# EAGLE board PCB_4 (EAGLE 6.5.0)
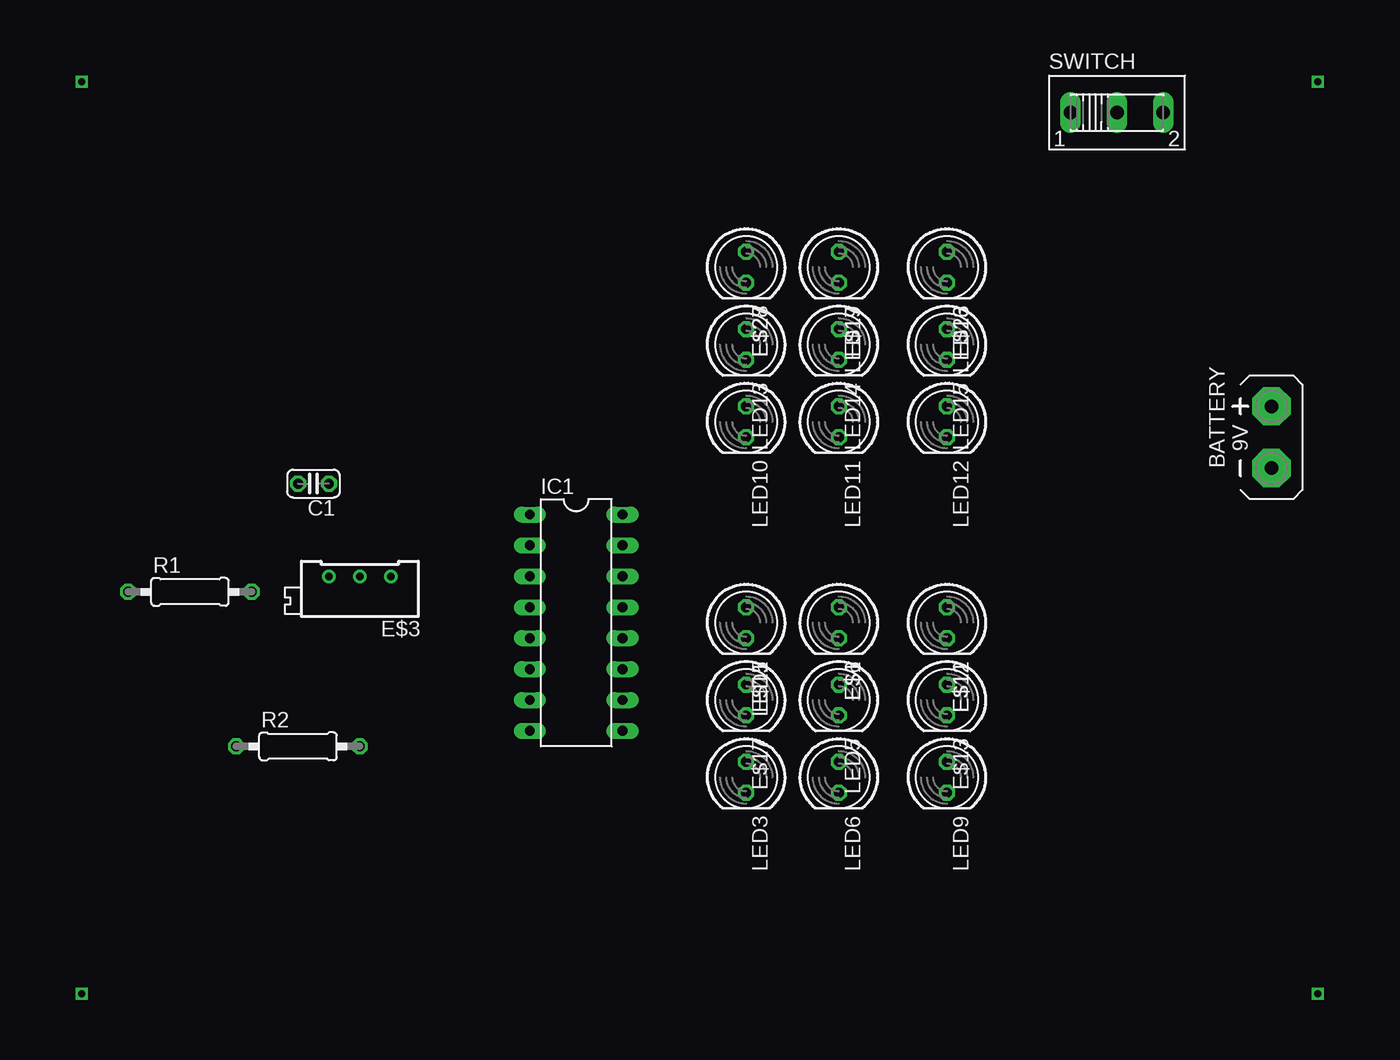
[diagram p0: board, top side]
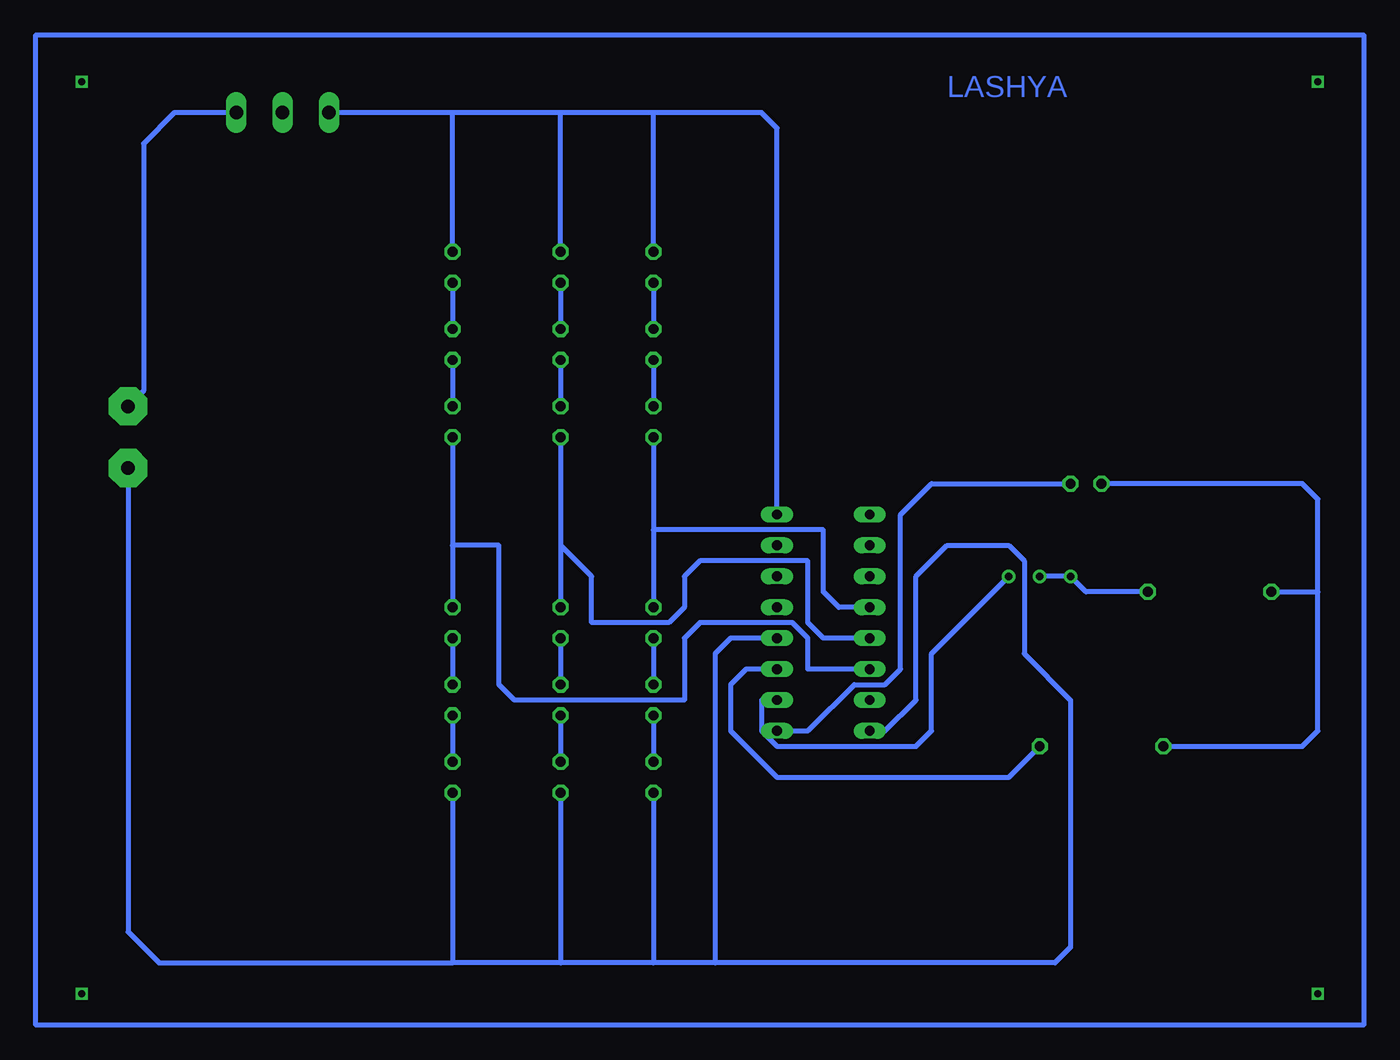
[diagram p1: board, bottom side, seen from below]

No outline drawn. Coordinates in mm, seen from the top.
Copper layers (1*16): Top 0.035mm / dielectric 1.5mm / Bottom 0.035mm
Design rules "default": minimum track width 10mil, minimum drill 24mil, track to track 8mil, track to pad 8mil, pad to pad 8mil, via to via 8mil, smd to smd 8mil, copper to edge 40mil, drill to drill 8mil, minimum pad ring 10mil, minimum via ring 8mil, stop-mask expansion 4mil, vias tented up to drill 0mil, thermal gap 10mil

## Footprints (pad centres in the part's own frame; a part is rotated, then mirrored left to right if it is on the bottom)
AB9V = drill 1.118 pad 3.15 octagon: + 0,2.54; - 0,-2.54
C025-024X044 = drill 0.813 octagon: 1 -1.27,0; 2 1.27,0
LED5MM = drill 0.813 octagon: A -1.27,0; K 1.27,0
RTRIM64X = drill 0.61: 1 1.27,-2.54; 2 1.27,0; 3 1.27,2.54
DIL16 = drill 0.813 long: 1 -8.89,-3.81; 2 -6.35,-3.81; 3 -3.81,-3.81; 4 -1.27,-3.81; 5 1.27,-3.81; 6 3.81,-3.81; 7 6.35,-3.81; 8 8.89,-3.81; 9 8.89,3.81; 10 6.35,3.81; 11 3.81,3.81; 12 1.27,3.81; 13 -1.27,3.81; 14 -3.81,3.81; 15 -6.35,3.81; 16 -8.89,3.81
0207/10 = drill 0.813 octagon: 1 -5.08,0; 2 5.08,0
255SB = drill 1.118 long: 1 -3.81,0; 2 0,0; 3 3.81,0

## Placement (x,y rotation side)
BATTERY  [AB9V]  100.33,49.53 0 top
C1  [C025-024X044]  21.59,45.72 180 top
E$1  [LED5MM]  64.77,34.29 270 top
E$3  47K  [RTRIM64X]  25.4,36.83 90 top
E$6  [LED5MM]  64.77,34.29 270 top
E$11  [LED5MM]  73.66,34.29 270 top
E$12  [LED5MM]  73.66,34.29 270 top
E$13  [LED5MM]  73.66,27.94 270 top
E$15  [LED5MM]  57.15,34.29 270 top
E$17  [LED5MM]  57.15,27.94 270 top
E$19  [LED5MM]  64.77,63.5 270 top
E$23  [LED5MM]  73.66,63.5 270 top
E$27  [LED5MM]  57.15,63.5 270 top
E$28  [LED5MM]  57.15,63.5 270 top
IC1  [DIL16]  43.18,34.29 270 top
LED1  [LED5MM]  57.15,34.29 270 top
LED3  [LED5MM]  57.15,21.59 270 top
LED5  [LED5MM]  64.77,27.94 270 top
LED6  [LED5MM]  64.77,21.59 270 top
LED9  [LED5MM]  73.66,21.59 270 top
LED10  [LED5MM]  57.15,50.8 270 top
LED11  [LED5MM]  64.77,50.8 270 top
LED12  [LED5MM]  73.66,50.8 270 top
LED13  [LED5MM]  57.15,57.15 270 top
LED14  [LED5MM]  64.77,57.15 270 top
LED15  [LED5MM]  73.66,57.15 270 top
LED16  [LED5MM]  73.66,63.5 270 top
LED17  [LED5MM]  64.77,63.5 270 top
R1  10K  [0207/10]  11.43,36.83 0 top
R2  470K  [0207/10]  20.32,24.13 0 top
SWITCH  [255SB]  87.63,76.2 0 top

## Library data of the parts
BATTERY = battery
C1 E$3 R1 R2 = resistor
E$1 E$6 E$11-E$13 E$15 E$17 E$19 E$23 E$27 E$28 LED1 LED3 LED5 LED6 LED9-LED17 = led
IC1 = ic-package
SWITCH = switch

## Nets
LED2: E$17.K LED3.A
LED4: E$1.K LED5.A
LED7: E$11.K E$13.A
LED8: E$13.K LED9.A
LED18: E$27.K LED13.A
S$1: E$19.A E$23.A E$27.A IC1.16 SWITCH.1
S$3: E$15.K E$17.A
S$4: E$3.1 IC1.10
S$5: IC1.11 R2.2
S$6: LED5.K LED6.A
S$7: E$3.2 E$3.3 R1.2
S$8: C1.2 R1.1 R2.1
S$9: LED10.A LED13.K
S$10: LED11.A LED14.K
S$11: LED12.A LED15.K
S$12: E$15.A IC1.4 LED10.K
S$13: E$19.K LED14.A
S$14: E$23.K LED15.A
S$15: BATTERY.+ SWITCH.3
S$16: E$1.A IC1.5 LED11.K
S$17: E$11.A IC1.6 LED12.K
S$18: C1.1 IC1.9
S$19: BATTERY.- IC1.8 IC1.12 LED3.K LED6.K LED9.K

## Tracks (layer width: path | path; a pad name or v marks a point on that pad's centre or on a via)
LED2
  Bottom 0.406: E$17.K LED3.A
LED4
  Bottom 0.406: E$1.K LED5.A
LED7
  Bottom 0.406: E$11.K E$13.A
LED8
  Bottom 0.406: E$13.K LED9.A
LED18
  Bottom 0.406: E$27.K LED13.A
S$1
  Bottom 0.406: 57.15,76.2 48.26,76.2 46.99,74.93 IC1.16 | 57.15,76.2 64.77,76.2 | 64.77,76.2 73.66,76.2 | E$27.A 57.15,76.2 | E$19.A 64.77,76.2 | E$23.A 73.66,76.2 | 73.66,76.2 SWITCH.1
S$2  (via drill 0.6)
  other vias: 2.54,78.74
S$3
  Bottom 0.406: E$15.K E$17.A
S$4
  Bottom 0.406: IC1.10 48.26,27.94 48.26,25.4 46.99,24.13 35.56,24.13 34.29,25.4 34.29,31.75 E$3.1
S$5
  Bottom 0.406: IC1.11 49.53,30.48 50.8,29.21 50.8,25.4 46.99,21.59 27.94,21.59 R2.2
S$6
  Bottom 0.406: LED5.K LED6.A
S$7
  Bottom 0.406: E$3.2 E$3.3 21.59,36.83 R1.2
S$8
  Bottom 0.406: R2.1 3.81,24.13 2.54,25.4 2.54,36.83 | 2.54,36.83 2.54,44.45 3.81,45.72 C1.2 | R1.1 2.54,36.83
S$9
  Bottom 0.406: LED13.K LED10.A
S$10
  Bottom 0.406: LED14.K LED11.A
S$11
  Bottom 0.406: LED15.K LED12.A
S$12
  Bottom 0.406: IC1.4 41.91,35.56 43.18,36.83 43.18,41.91 57.15,41.91 | LED10.K 57.15,41.91 | 57.15,41.91 E$15.A
S$13
  Bottom 0.406: E$19.K LED14.A
S$14
  Bottom 0.406: E$23.K LED15.A
S$15
  Bottom 0.406: SWITCH.3 96.52,76.2 99.06,73.66 99.06,53.34 BATTERY.+
S$16
  Bottom 0.406: IC1.5 43.18,33.02 44.45,34.29 44.45,39.37 53.34,39.37 54.61,38.1 54.61,35.56 55.88,34.29 62.23,34.29 62.23,38.1 64.77,40.64 | LED11.K 64.77,40.64 | 64.77,40.64 E$1.A
S$17
  Bottom 0.406: IC1.6 44.45,30.48 44.45,33.02 45.72,34.29 53.34,34.29 54.61,33.02 54.61,27.94 68.58,27.94 69.85,29.21 69.85,40.64 73.66,40.64 | LED12.K 73.66,40.64 | 73.66,40.64 E$11.A
S$18
  Bottom 0.406: C1.1 34.29,45.72 36.83,43.18 36.83,30.48 38.1,29.21 40.64,29.21 44.45,25.4 IC1.9
S$19
  Bottom 0.406: IC1.12 50.8,33.02 52.07,31.75 52.07,6.35 | IC1.8 38.1,25.4 35.56,27.94 35.56,38.1 33.02,40.64 27.94,40.64 26.67,39.37 26.67,31.75 22.86,27.94 22.86,7.62 24.13,6.35 52.07,6.35 | BATTERY.- 100.33,8.89 97.79,6.35 73.66,6.35 | 52.07,6.35 57.15,6.35 | 57.15,6.35 64.77,6.35 | 64.77,6.35 73.66,6.35 | LED3.K 57.15,6.35 | LED6.K 64.77,6.35 | LED9.K 73.66,6.35
S$20  (via drill 0.6)
  other vias: 104.14,78.74
S$21
  Bottom 0.406: -1.27,82.55 107.95,82.55 107.95,1.27 -1.27,1.27 -1.27,82.55
S$22  (via drill 0.6)
  other vias: 104.14,3.81
S$23  (via drill 0.6)
  other vias: 2.54,3.81

## Text on the board
Bottom: LASHYA